# EAGLE board alt1.2 (EAGLE 6.6.0)

Size 60.33 x 41.36 mm. Coordinates in mm from the lower left corner, seen from the top.
Outline: 0,0 0,9.61 0,35.01 0,41.36 15.88,41.36 55.56,41.36 60.33,41.36 60.33,35.01 60.33,9.61 60.33,0.09 55.56,0.09 15.88,0.09 0.25,0.09 0.25,0 0,0
Outline: circle at 15.88,9.61 radius 3.17
Outline: circle at 15.88,35.01 radius 3.17
Outline: circle at 55.56,35.01 radius 3.17
Outline: circle at 55.56,9.61 radius 3.17
Copper layers (1*16): Top 0.035mm / dielectric 1.5mm / Bottom 0.035mm
Design rules "default": minimum track width 10mil, minimum drill 24mil, track to track 8mil, track to pad 8mil, pad to pad 8mil, via to via 8mil, smd to smd 8mil, copper to edge 40mil, drill to drill 8mil, minimum pad ring 10mil, minimum via ring 8mil, stop-mask expansion 4mil, vias tented up to drill 0mil, thermal gap 10mil

## Footprints (pad centres in the part's own frame; a part is rotated, then mirrored left to right if it is on the bottom)
DO35-3 = drill 0.9: A 3.81,0 | drill 0.9 square: C -3.81,0
TO92- = drill 0.7 octagon: 1 2.54,0; 2 0,0; 3 -2.54,0
R0207/3 = drill 0.7: 1 -3.81,0; 2 3.81,0
SPST = drill 0.7 square: 1 -1.27,0; 2 1.27,0

## Placement (x,y rotation side)
D1  1N4148-3  [DO35-3]  -19.05,14.69 0 top  (outside the outline)
D2  1N4148-3  [DO35-3]  -30.48,14.69 0 top  (outside the outline)
D3  1N4148-3  [DO35-3]  -41.91,14.69 0 top  (outside the outline)
D4  1N4148-3  [DO35-3]  -19.05,19.77 0 top  (outside the outline)
D5  1N4148-3  [DO35-3]  -30.48,19.77 0 top  (outside the outline)
D6  1N4148-3  [DO35-3]  -41.91,19.77 0 top  (outside the outline)
D7  1N4148-3  [DO35-3]  -19.05,24.85 0 top  (outside the outline)
D8  1N4148-3  [DO35-3]  -30.48,24.85 0 top  (outside the outline)
Q1  2N3904  [TO92-]  -17.78,3.26 0 top  (outside the outline)
R1  1K  [R0207/3]  -40.64,24.85 0 top  (outside the outline)
R2  300K  [R0207/3]  -17.78,29.93 0 top  (outside the outline)
R3  30k  [R0207/3]  -27.94,29.93 0 top  (outside the outline)
R4  30k  [R0207/3]  -38.1,29.93 0 top  (outside the outline)
R5  30k  [R0207/3]  -17.78,35.01 0 top  (outside the outline)
R6  30k  [R0207/3]  -27.94,35.01 0 top  (outside the outline)
R7  30k  [R0207/3]  -38.1,35.01 0 top  (outside the outline)
R8  30k  [R0207/3]  -17.78,40.09 0 top  (outside the outline)
R9  30k  [R0207/3]  -27.94,40.09 0 top  (outside the outline)
R10  30k  [R0207/3]  -38.1,40.09 0 top  (outside the outline)
SW1  MOMENTARYSPST1  [SPST]  -25.4,1.99 0 top  (outside the outline)
SW2  MOMENTARYSPST1  [SPST]  -31.75,1.99 0 top  (outside the outline)
SW3  MOMENTARYSPST1  [SPST]  -38.1,1.99 0 top  (outside the outline)
SW4  MOMENTARYSPST1  [SPST]  -16.51,8.34 0 top  (outside the outline)
SW5  MOMENTARYSPST1  [SPST]  -22.86,8.34 0 top  (outside the outline)
SW6  MOMENTARYSPST1  [SPST]  -29.21,8.34 0 top  (outside the outline)
SW7  MOMENTARYSPST1  [SPST]  -35.56,8.34 0 top  (outside the outline)
SW8  MOMENTARYSPST1  [SPST]  -41.91,8.34 0 top  (outside the outline)

## Library data of the parts
D1-D8 = gm-diodes
Q1 = gm-trans
R1-R10 = gm-resistors
SW1-SW8 = gm-switches

## Nets
GND: Q1.3 R2.1 SW1.2 SW2.2 SW3.2 SW4.2 SW5.2 SW6.2 SW7.2 SW8.2
N$1: Q1.2 R1.2 R2.2
N$2: D2.A R4.2 SW2.1
N$3: Q1.1
N$5: D1.A R3.2 SW1.1
N$8: D3.A R5.2 SW3.1
N$10: D4.A R6.2 SW4.1
N$12: D5.A R7.2 SW5.1
N$14: D6.A R8.2 SW6.1
N$15: D1.C D2.C D3.C D4.C D5.C D6.C D7.C R1.1
N$16: D7.A R9.2 SW7.1
N$18: D8.A R10.2 SW8.1
N$19: D8.C

## Tracks (layer width: path | path; a pad name or v marks a point on that pad's centre or on a via)
GND  (9 unrouted)
N$1  (2 unrouted)
N$2  (2 unrouted)
N$5  (2 unrouted)
N$8  (2 unrouted)
N$10  (2 unrouted)
N$12  (2 unrouted)
N$14  (2 unrouted)
N$15  (7 unrouted)
N$16  (2 unrouted)
N$18  (2 unrouted)